# Allegro board TIDA-01606_Gate DriverE4_Sch_Rev13.brd
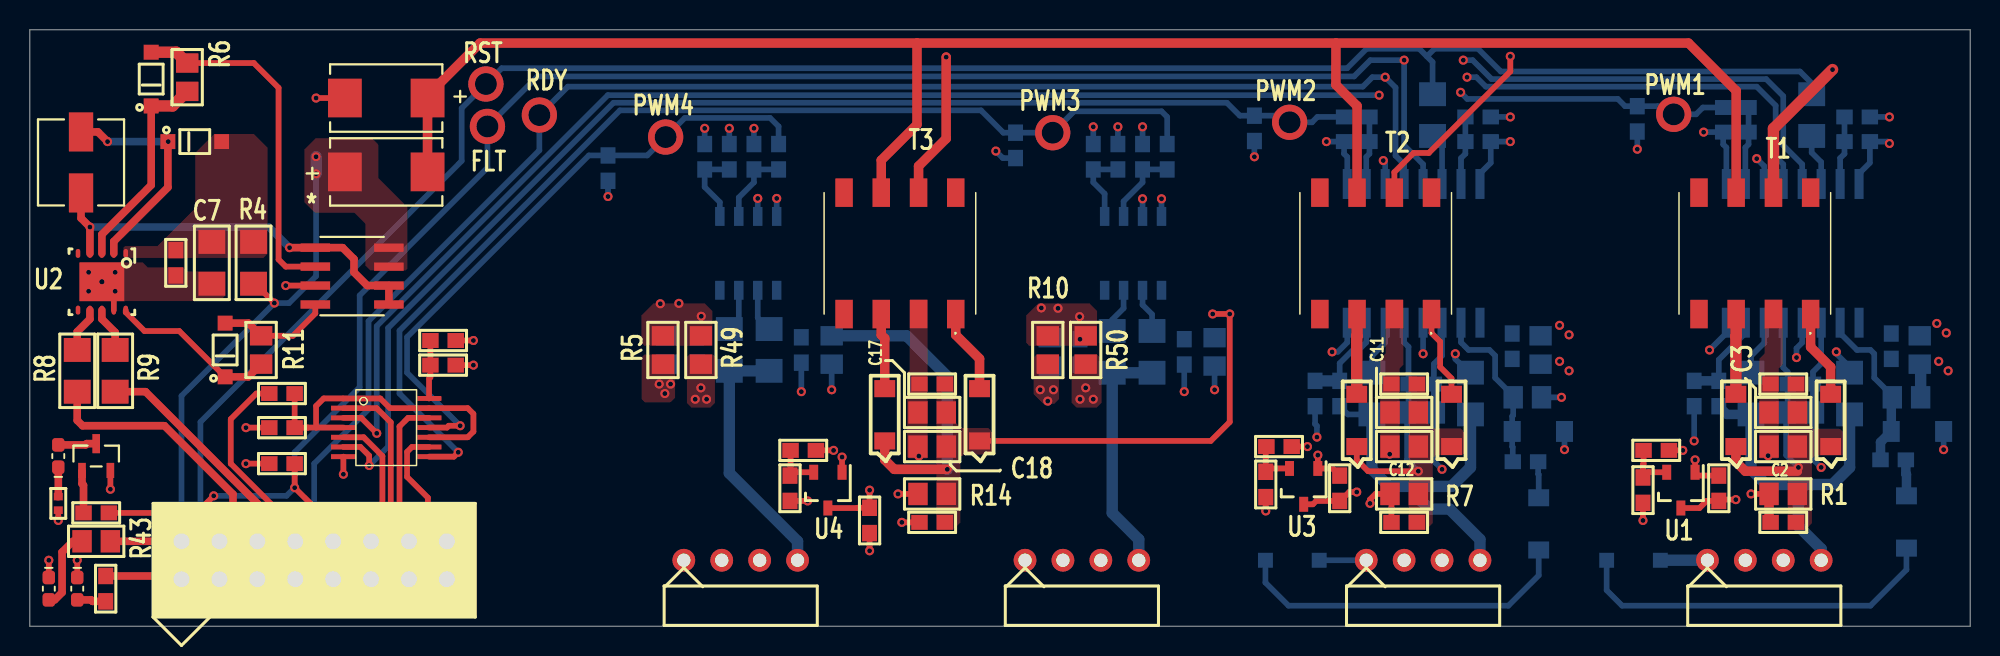
[diagram p0: board, top side]
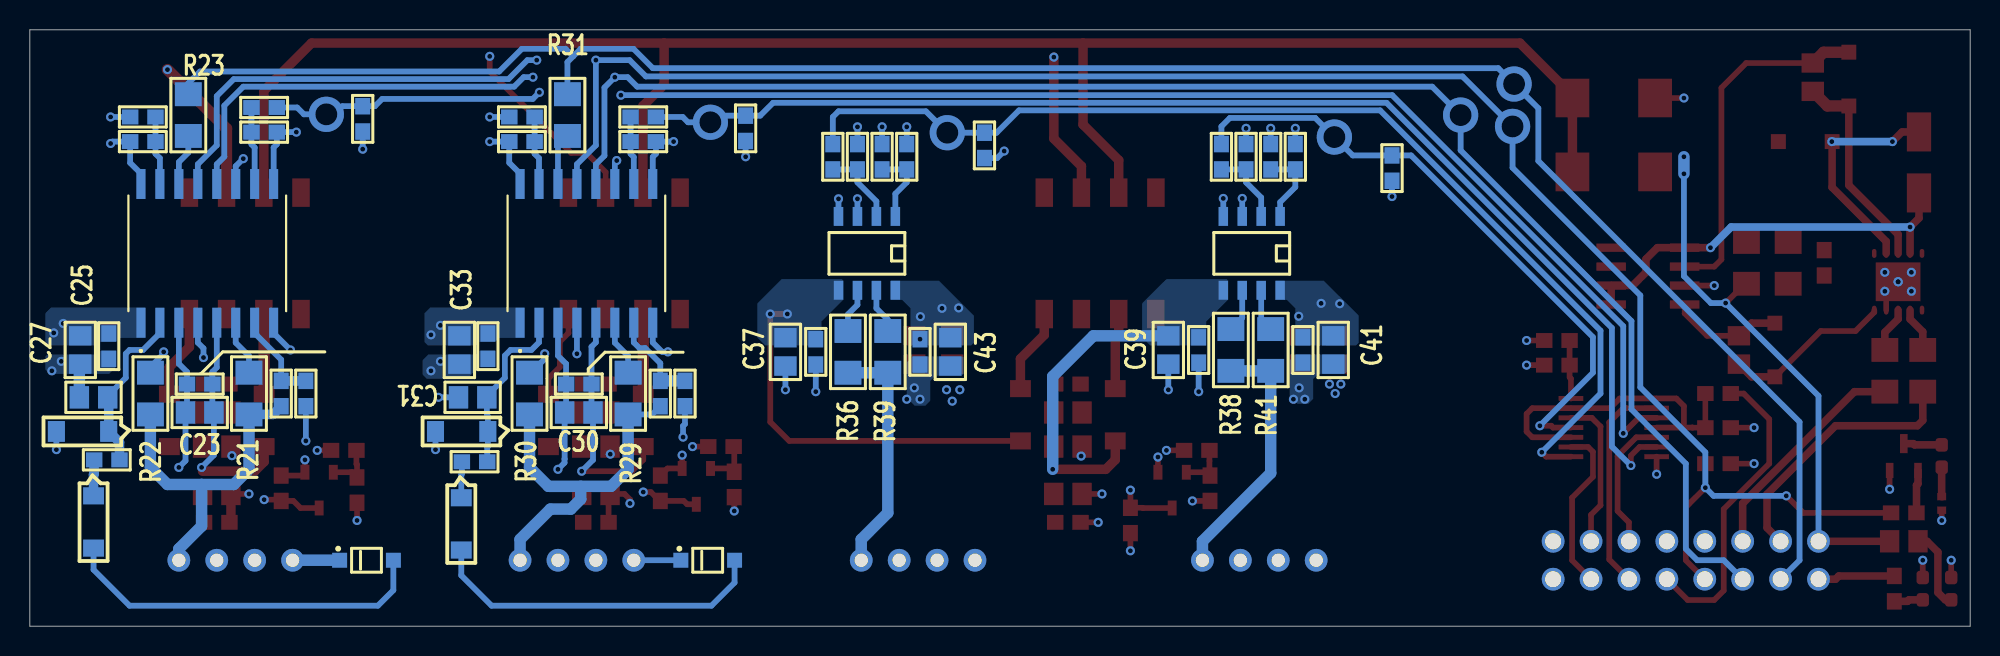
[diagram p1: board, bottom side, seen from below]

Outline 130 x 39.98 mm; copper layers: TOP, PWR_LAYER, GND_LAYER, BOTTOM. Coordinates in mm from the lower left corner of the outline.
Outline path: 0,39.98 0,0 130,0 130,39.98 0,39.98

## Design rules (mm)
constraint set DEFAULT: min track width 0.127

## Placement (name value [footprint] x y rotation side)
C1  0.1u 0603 25V  [RES0603]  117.47 6.96 180 top
C2  4.7u 0805 50V  [SNPD0805_MODIFIED]  117.47 12.04 180 top
C3  4.7u 0805 50V  [SNPD0805_MODIFIED]  117.47 14.33 180 top
C4  0.1u 0603 25V  [RES0603]  117.47 16.23 180 top
C5  0.1u 0603 25V  [RES0603]  113.16 9.25 270 top
C6  3.3u 50V 105C  [CAP2917]  23.88 30.45 0 top
C7  10u 1206 50V  [SNPD1206_MODIFIED]  12.19 24.36 270 top
C8  0.33u 0603 50V  [RES0603]  9.78 24.36 270 top
C9  0.1u 63V 105C  [CAP_J-V_5X6P1]  3.43 31.09 270 top
C10  0.1u 0603 25V  [RES0603]  92.08 6.96 180 top
C11  4.7u 0805 50V  [SNPD0805_MODIFIED]  92.08 14.33 180 top
C12  4.7u 0805 50V  [SNPD0805_MODIFIED]  92.08 12.04 180 top
C13  0.1u 0603 25V  [RES0603]  92.08 16.23 180 top
C14  3.3u 50V 105C  [CAP2917]  23.88 35.41 180 top
C15  0.1u 0603 25V  [RES0603]  87.76 9.25 270 top
C16  0.1u 0603 25V  [RES0603]  60.45 6.96 180 top
C17  4.7u 0805 50V  [SNPD0805_MODIFIED]  60.45 14.33 180 top
C18  4.7u 0805 50V  [SNPD0805_MODIFIED]  60.45 12.04 180 top
C19  0.1u 0603 25V  [RES0603]  60.45 16.23 180 top
C20  0.1u 0603 25V  [RES0603]  56.26 7.09 90 top
C21  0.1u 0603 50V  [RES0603]  122.43 32.49 0 bottom
C22  0.1u 0603 50V  [RES0603]  118.62 16.23 0 bottom
C23  10u 0805 35V  [SNPD0805_MODIFIED]  118.62 14.33 0 bottom
C24  0.1u 0603 50V  [RES0603]  27.69 17.5 0 top
C25  100pF 0805 50V  [SNPD0805_MODIFIED]  125.73 15.34 0 bottom
C26  0.1u 0603 50V  [RES0603]  124.71 18.77 270 bottom
C27  10u 0805 35V  [SNPD0805_MODIFIED]  126.62 18.52 270 bottom
C28  0.1u 0603 50V  [RES0603]  97.03 32.49 0 bottom
C29  0.1u 0603 50V  [RES0603]  93.22 16.23 0 bottom
C30  10u 0805 35V  [SNPD0805_MODIFIED]  93.22 14.33 0 bottom
C31  100pF 0805 50V  [SNPD0805_MODIFIED]  100.33 15.34 0 bottom
C32  0.1u 0603 50V  [RES0603]  99.31 18.77 270 bottom
C33  10u 0805 35V  [SNPD0805_MODIFIED]  101.22 18.52 270 bottom
C34  0.1u 0603 50V  [RES0603]  72.9 31.47 90 bottom
C35  0.1u 0603 50V  [RES0603]  46.86 31.47 90 bottom
C36  0.1u 0603 50V  [RES0603]  77.34 18.39 270 bottom
C37  10u 0805 35V  [SNPD0805_MODIFIED]  79.38 18.39 270 bottom
C38  0.1u 0603 50V  [RES0603]  51.69 18.52 270 bottom
C39  10u 0805 35V  [SNPD0805_MODIFIED]  53.72 18.52 270 bottom
C40  0.1u 0603 50V  [RES0603]  44.7 18.52 270 bottom
C41  10u 0805 35V  [SNPD0805_MODIFIED]  42.67 18.52 270 bottom
C42  0.1u 0603 50V  [RES0603]  70.36 18.39 270 bottom
C43  10u 0805 35V  [SNPD0805_MODIFIED]  68.33 18.39 270 bottom
C44  100pF 0603 50V  [RES0603]  114.3 33.12 180 bottom
C45  100pF 0603 50V  [RES0603]  88.9 32.49 180 bottom
C46  100pF 0603 50V  [RES0603]  74.55 31.47 90 bottom
C47  100pF 0603 50V  [RES0603]  48.51 31.47 90 bottom
D1  MBR0580-TP  [SOD123]  120.65 12.04 90 top
D2  B160-13-F  [DO214]  11.05 32.49 0 top
D3  LSM115JE3/TR13  [DO214]  8.13 36.68 90 top
D4  MBR0580-TP  [SOD123]  95.25 12.04 90 top
D5  LSM115JE3/TR13  [DO214]  13.08 18.52 90 top
D6  MBR0580-TP  [SOD123]  88.9 12.04 90 top
D7  RS1MB-13-F  [DO214]  107.44 4.42 180 bottom
D8  MMSZ4699T1G 12V  [SOD123]  124.71 13.06 0 bottom
D9  RS1MB-13-F  [DO214]  84.58 4.42 180 bottom
D10  MMSZ4699T1G 12V  [SOD123]  99.31 13.06 0 bottom
D11  LED RED 0603  [LED0603]  1.91 11.4 90 top
D12  LED GREEN 0603  [LED0603]  3.17 2.51 270 top
D13  LED GREEN 0603  [LED0603]  1.27 2.51 270 top
D14  MBR0580-TP  [SOD123]  114.3 12.04 90 top
D15  MBR0580-TP  [SOD123]  63.63 12.42 90 top
D16  MBR0580-TP  [SOD123]  57.28 12.42 90 top
D17  MMSZ4683T1G 3V  [SOD123]  125.73 8.74 270 bottom
D18  MMSZ4683T1G 3V  [SOD123]  101.09 8.61 270 bottom
J1  HEADER 8X2  [CONN8X2]  10.16 3.15 0 top
J2  HEADER 4  [SIP4_RUP]  112.39 4.42 90 top
J3  HEADER 4  [SIP4_RUP]  89.53 4.42 90 top
J5  HEADER 4  [SIP4_RUP]  66.67 4.42 90 top
J6  HEADER 4  [SIP4_RUP]  43.81 4.42 90 top
Q1  NAMT20  [D8]  21.59 23.47 0 top
Q2  BC856A-7-F  [SOT23]  4.45 11.4 0 top
R1  4.7K 0805 5%  [SNPD0805_MODIFIED]  117.47 8.86 0 top
R2  4.99K 0603 1%  [RES0603]  108.97 11.79 0 top
R3  4.99K 0603 1%  [RES0603]  108.08 9.12 90 top
R4  0E 1206 5%  [SNPD1206_MODIFIED]  14.99 24.36 270 top
R5  0E 0805 5%  [SNPD0805_MODIFIED]  42.42 18.52 270 top
R6  17.8E 0805 1%  [SNPD0805_MODIFIED]  10.54 36.8 90 top
R7  4.7K 0805 5%  [SNPD0805_MODIFIED]  92.08 8.86 0 top
R8  0E 1206 5%  [SNPD1206_MODIFIED]  3.17 17.12 90 top
R9  0E 1206 5%  [SNPD1206_MODIFIED]  5.71 17.12 90 top
R10  0E 0805 5%  [SNPD0805_MODIFIED]  68.2 18.52 270 top
R11  17.8E 0805 1%  [SNPD0805_MODIFIED]  15.49 18.52 90 top
R12  4.99K 0603 1%  [RES0603]  83.69 12.04 0 top
R13  4.99K 0603 1%  [RES0603]  82.8 9.5 90 top
R14  4.7K 0805 5%  [SNPD0805_MODIFIED]  60.45 8.86 0 top
R15  4.99K 0603 1%  [RES0603]  51.82 11.79 0 top
R16  4.99K 0603 1%  [RES0603]  50.93 9.25 90 top
R17  10E 0603 1%  [RES0603]  122.43 34.14 180 bottom
R18  10E 0603 1%  [RES0603]  27.69 19.15 180 top
R19  100E 0603 1%  [RES0603]  114.3 34.77 0 bottom
R20  1K 0603 5%  [RES0603]  124.84 11.15 0 bottom
R21  2E 1206 1%  [SNPD1206_MODIFIED]  115.32 15.6 270 bottom
R22  2E 1206 1%  [SNPD1206_MODIFIED]  121.92 15.6 270 bottom
R23  0E 1206 5%  [SNPD1206_MODIFIED]  119.38 34.26 270 bottom
R24  0E 0603 5%  [RES0603]  16.89 15.6 0 top
R25  10K 0603 1%  [RES0603]  16.89 13.31 0 top
R26  10E 0603 1%  [RES0603]  97.03 34.14 180 bottom
R27  100E 0603 1%  [RES0603]  88.9 34.14 0 bottom
R28  1K 0603 5%  [RES0603]  100.2 11.02 0 bottom
R29  2E 1206 1%  [SNPD1206_MODIFIED]  89.92 15.6 270 bottom
R30  2E 1206 1%  [SNPD1206_MODIFIED]  96.52 15.6 270 bottom
R31  0E 1206 5%  [SNPD1206_MODIFIED]  93.98 34.26 270 bottom
R32  10K 0603 1%  [RES0603]  16.89 10.9 180 top
R33  10E 0603 1%  [RES0603]  71.25 31.47 270 bottom
R34  10E 0603 1%  [RES0603]  45.21 31.47 270 bottom
R35  100E 0603 1%  [RES0603]  76.2 31.47 270 bottom
R36  3.3E 1206 5%  [SNPD1206_MODIFIED]  75.18 18.39 270 bottom
R37  100E 0603 1%  [RES0603]  50.16 31.47 270 bottom
R38  3.3E 1206 5%  [SNPD1206_MODIFIED]  49.53 18.52 270 bottom
R39  3.3E 1206 5%  [SNPD1206_MODIFIED]  72.52 18.39 270 bottom
R40  20K 0603 1%  [RES0603]  4.45 7.59 180 top
R41  3.3E 1206 5%  [SNPD1206_MODIFIED]  46.86 18.52 270 bottom
R42  620E 0603 1%  [RES0603]  5.08 2.51 90 top
R43  1.3K 0805 5%  [SNPD0805_MODIFIED]  4.45 5.69 0 top
R44  120E 0402 5%  [RES0402]  1.91 8.23 90 top
R45  0E 0603  5%  [RES0603]  111.51 15.6 270 bottom
R46  NC  [RES0603]  113.16 15.6 270 bottom
R47  0E 0603  5%  [RES0603]  86.11 15.6 270 bottom
R48  NC  [RES0603]  87.76 15.6 270 bottom
R49  NC  [SNPD0805_MODIFIED]  44.96 18.52 90 top
R50  NC  [SNPD0805_MODIFIED]  70.74 18.52 90 top
R51  10K 0603 1%  [RES0603]  38.73 30.71 90 bottom
R52  10K 0603 1%  [RES0603]  66.04 32.23 90 bottom
R53  10K 0603 1%  [RES0603]  82.04 33.38 90 bottom
R54  10K 0603 1%  [RES0603]  107.7 34.01 90 bottom
T1  -  [750343804]  115.57 24.99 90 top
T2  -  [750343804]  90.17 24.99 90 top
T3  -  [750343804]  58.29 24.99 90 top
U1  DBZ0003A  [DBZ0003A_N]  110.62 9.12 270 top
U2  UCC27211DPRR  [DPR0010A]  4.83 23.09 270 top
U3  DBZ0003A  [DBZ0003A_N]  85.34 9.37 270 top
U4  DBZ0003A  [DBZ0003A_N]  53.47 9.12 270 top
U5  ISO5852SDWR  [DW0016A_N]  118.11 24.99 90 bottom
U6  SN74LVC126APWR  [TSSOP14]  23.88 13.31 0 top
U7  ISO5852SDWR  [DW0016A_N]  92.71 24.99 90 bottom
U8  UCC5320SCD  [SOIC8_REV1]  73.91 24.99 270 bottom
U9  UCC5320SCD  [SOIC8_REV1]  48.13 24.99 270 bottom

## Library data of the parts
C1-C5 C7 C8 C10-C13 C15-C47 = CAP NP: room: control_smps
C6 C14 = CAP: room: 24Vcc3_smps
C9 = CAP: User Part Number: PN; Tolerance: TOL; room: 24Vcc3_smps
D1-D6 D8 D10 D14-D18 = DIODE ZENER: room: control_smps
D7 D9 = DIODE: room: pwmIC
D11-D13 = LED: room: lcd_led_pic
J1 = HEADER 8X2_0
J2 = HEADER 4_0
J3 = HEADER 4_1
J5 = HEADER 4_2
J6 = HEADER 4_3
Q1 = NAMT20_1: User Part Number: PN
Q2 = PNP BEC
R1-R54 = RESISTOR: room: control_smps
T1-T3 = TRANSFORMER STEPUP_0
U1 = DIODE ZENER_4: User Part Number: PN; Tolerance: TOL; room: control_smps
U2 = UCC21520ADWR_1: User Part Number: PN; Tolerance: TOL; room: DrvIC_Aph_driver
U3 = DIODE ZENER_5: User Part Number: PN; Tolerance: TOL; room: control_smps
U4 = DIODE ZENER_6: User Part Number: PN; Tolerance: TOL; room: control_smps
U5 = UCC21520ADWR_4: User Part Number: PN; Tolerance: TOL; room: DrvIC_Aph_driver
U6 = DM3AT-SF-PEJM5_2
U7 = UCC21520ADWR_5: User Part Number: PN; Tolerance: TOL; room: DrvIC_Aph_driver
U8 U9 = DM3AT-SF-PEJM5_1

## Footprints (pads in the part's own frame, mm; a bottom-side part is the same pattern mirrored in y, then rotated)
750343804
  rect 1.91x1.17 smd: 1(-4.07,-3.74) 2(-4.07,-1.25) 3(-4.07,1.25) 4(-4.07,3.74) 5(4.07,3.74) 6(4.07,1.25) 7(4.07,-1.25) 8(4.07,-3.74)
CAP2917
  rect 2.261x2.591 smd: 1(-2.769,0) 2(2.769,0)
CAP_J-V_5X6P1
  rect 2.616x1.626 smd: 1(-2.045,0) 2(2.045,0)
CONN8X2
  round 1.524 hole 1.067: 1(0,0) 2(0,2.54) 3(2.54,0) 4(2.54,2.54) 5(5.08,0) 6(5.08,2.54) 7(7.62,0) 8(7.62,2.54) 9(10.16,0) 10(10.16,2.54) 11(12.7,0) 12(12.7,2.54) 13(15.24,0) 14(15.24,2.54) 15(17.78,0) 16(17.78,2.54)
D8
  rect 1.981x0.559 smd: 1(-2.464,1.905) 2(-2.464,0.635) 3(-2.464,-0.635) 4(-2.464,-1.905) 5(2.464,-1.905) 6(2.464,-0.635) 7(2.464,0.635) 8(2.464,1.905)
DBZ0003A_N
  rect 1x0.6 smd: 1(-1.2,0.95) 2(-1.2,-0.95) 3(1.2,0)
DO214
  rect 1x1 smd: 1(-1.8,0) 2(1.8,0)
DPR0010A
  oval 0.6x0.3 smd: 1(-1.9,1.6) 2(-1.9,0.8) 3(-1.9,0) 4(-1.9,-0.8) 5(-1.9,-1.6) 6(1.9,-1.6) 7(1.9,-0.8) 8(1.9,0) 9(1.9,0.8) 10(1.9,1.6)
  rect 2.6x3 smd: 11(0,0)
DW0016A_N
  rect 2.007x0.61 smd: 1(-4.65,4.445) 2(-4.65,3.175) 3(-4.65,1.905) 4(-4.65,0.635) 5(-4.65,-0.635) 6(-4.65,-1.905) 7(-4.65,-3.175) 8(-4.65,-4.445) 9(4.65,-4.445) 10(4.65,-3.175) 11(4.65,-1.905) 12(4.65,-0.635) 13(4.65,0.635) 14(4.65,1.905) 15(4.65,3.175) 16(4.65,4.445)
LED0603
  custom 0.91x0.83 smd: 1(-0.75,0) 2(0.75,0)
RES0402
  rect 0.5x0.6 smd: 1(-0.455,0) 2(0.455,0)
RES0603
  rect 1.1x1 smd: 1(-0.85,0) 2(0.85,0)
SIP4_RUP
  round 1.524 hole 0.889: 1(0,0) 2(0,-2.54) 3(0,-5.08) 4(0,-7.62)
SNPD0805_MODIFIED
  rect 1.3x1.5 smd: 1(-0.95,0) 2(0.95,0)
SNPD1206_MODIFIED
  rect 1.6x1.8 smd: 1(-1.4,0) 2(1.4,0)
SOD123
  rect 1.143x1.397 smd: 1(0,0) 2(3.505,0)
SOIC8_REV1
  rect 1.27x0.635 smd: 1(-2.477,1.905) 2(-2.477,0.635) 3(-2.477,-0.635) 4(-2.477,-1.905) 5(2.477,-1.905) 6(2.477,-0.635) 7(2.477,0.635) 8(2.477,1.905)
SOT23
  rect 0.508x1.016 smd: 1(-0.95,-0.965) 2(0.95,-0.965)
  rect 0.508x1.283 smd: 3(0,0.832)
TSSOP14
  rect 1.651x0.33 smd: 1(-2.87,1.956) 2(-2.87,1.306) 3(-2.87,0.655) 4(-2.87,0.005) 5(-2.87,-0.645) 6(-2.87,-1.295) 7(-2.87,-1.946) 8(2.87,-1.946) 9(2.87,-1.295) 10(2.87,-0.645) 11(2.87,0.005) 12(2.87,0.655) 13(2.87,1.306) 14(2.87,1.956)

## Nets
+3V3: J1.1 Q2.2(EMITTER) R17.1 R18.1 R26.1 R32.2 R33.1 R34.1 R42.2
+12V_MID: C16.1 C17.1 C18.1 C19.1 C36.1 C37.1 C38.1 C39.1 D15.1(CATHODE) D16.1(CATHODE) R14.2 U8.5 U9.5
+15V: C6.1 J1.2 Q1.7 Q1.8 R4.2 R43.2
+20V_BOT: C10.1 C11.1 C12.1 C13.1 C29.1 C30.1 D4.1(CATHODE) D6.1(CATHODE) R7.2 U7.5
+20V_TOP: C1.1 C2.1 C3.1 C4.1 C22.1 C23.1 D1.1(CATHODE) D14.1(CATHODE) R1.2 U5.5
-5V_BOT: C11.2 C12.2 C13.2 C15.2 C32.1 C33.1 R13.1 T2.2 U3.3 U7.1 U7.8(VEE2A)
-5V_MID: C17.2 C18.2 C19.2 C20.2 R5.2 R10.2 R16.1 T3.2 U4.3
-5V_TOP: C2.2 C3.2 C4.2 C5.2 C26.1 C27.1 R3.1 T1.2 U1.3 U5.1 U5.8(VEE2A)
0: C1.2 C5.1 C7.2 C8.2 C10.2 C14.2 C15.1 C16.2 C20.1 C21.2 C22.2 C23.2 C24.2 C25.2 C26.2 C27.2 C28.2 C29.2 C30.2 C31.2 C32.2 C33.2 C34.2 C35.2 C36.2 C37.2 C38.2 C39.2 C40.2 C41.2 C42.2 C43.2 C44.2 C45.2 C46.2 C47.2 D8.2 D10.2 D12.1(CATHODE) D13.1(CATHODE) J1.15 J1.16 J2.3 J3.3 J5.3 J6.3 Q1.3(S2) R1.1 R2.2 R7.1 R12.2 R14.1 R15.2 R25.1 R44.1 R45.2 R47.2 R49.1 R50.1 R51.1 R52.1 R53.1 R54.1 U1.1 U2.9(VSS) U2.11 U3.1 U4.1 U5.3 U5.9 U5.11 U5.16 U6.7 U7.3 U7.9 U7.11 U7.16 U8.3 U8.4 U9.3 U9.4
DESAT_BOT: D9.1(K) J3.1
DESAT_TOP: D7.1(K) J2.1
FLT: J1.7 R32.1 R40.1 U5.13 U7.13
GATE_BOT: J3.4 R29.2 R30.2 R48.2
GATE_MID_BOT: J6.4 R38.2 R41.2
GATE_MID_TOP: J5.4 R36.2 R39.2
GATE_TOP: J2.4 R21.2 R22.2 R46.2
HI_PWM: J1.4 R8.1
HS: C9.2 Q1.1 Q1.5 Q1.6 T1.7 T2.7 T3.7 U2.4
HSG: D3.1(CATHODE) R6.1 U2.3
LI_PWM: J1.6 R9.1
LS1: C6.2 C14.1 T1.6 T2.6 T3.6
LSG: D5.1(CATHODE) R11.1 U2.10
PWM1: J1.11 U6.2
PWM1_B: R19.1 R54.2 U6.3
PWM2: J1.12 U6.5
PWM2_B: R27.1 R53.2 U6.6
PWM3: J1.13 U6.9
PWM3_B: R35.1 R52.2 U6.8
PWM4: J1.14 U6.12
PWM4_B: R37.1 R51.2 U6.11
PWM_EN: J1.9 R24.1
RDY: J1.5 U5.12 U7.12
RST: J1.3 R23.1 R31.1
N14260728: R8.2 U2.7
N14260730: R9.2 U2.8
N14260848: C7.1 C8.1 D2.2 R4.1 U2.1
N14261056: C9.1 D2.1(CATHODE) U2.2
N14261289: D3.2 Q1.2 R6.2
N14261406: D5.2 Q1.4 R11.2
N14262465: D1.2 T1.1
N14262469: D14.2 T1.3
N14263632: R2.1 R3.2 U1.2(REF)
N14266555: D4.2 T2.1
N14266595: D6.2 T2.3
N14266769: R12.1 R13.2 U3.2(REF)
N14267414: D15.2 T3.1
N14267454: D16.2 T3.3
N14267628: R15.1 R16.2 U4.2(REF)
N14268473: C21.1 R17.2 U5.15
N14268603: C44.1 R19.2 U5.10
N14268836: R23.2 U5.14
N14269969: C25.1 D8.1(CATHODE) R20.1 U5.2
N14270095: R45.1 R46.1 U5.7
N14270209: R22.1 U5.4
N14270213: R21.1 U5.6
N14271306: C28.1 R26.2 U7.15
N14271358: C45.1 R27.2 U7.10
N14271436: R31.2 U7.14
N14271630: C31.1 D10.1(CATHODE) R28.1 U7.2
N14271680: R47.1 R48.1 U7.7
N14271756: R30.1 U7.4
N14271760: R29.1 U7.6
N14273731: C34.1 R33.2 U8.1
N14274223: C46.1 R35.2 U8.2
N14275263: R36.1 U8.6
N14275267: R39.1 U8.7
N14275449: C42.1 C43.1 R10.1 R50.2 U8.8(VEE2)
N14277948: C35.1 R34.2 U9.1
N14278020: C47.1 R37.2 U9.2
N14278158: R38.1 U9.6
N14278178: R41.1 U9.7
N14278260: C40.1 C41.1 R5.1 R49.2 U9.8(VEE2)
N14279464: C24.1 R18.2 U6.14(VCC)
N14279480: R24.2 R25.2 U6.1 U6.4 U6.10 U6.13
N14283740: D12.2 R42.1
N14284020: D13.2 R43.1
N14289569: Q2.1 R40.2
N14289599: D11.2 Q2.3
N14303671: D17.1(CATHODE) R20.2
N142699350: D7.2 D17.2
N142715901: D18.1(CATHODE) R28.2
N142716060: D9.2 D18.2
N142895931: D11.1(CATHODE) R44.2

Pads without a net: J1 8 10; J2 2; J3 2; J5 1 2; J6 1 2; T1 4 5 8; T2 4 5 8; T3 4 5 8; U2 5 6

## Via types
v1: diameter 2.362, hole 1.473, TOP to BOTTOM, 7 vias
v2: diameter 0.61, hole 0.33, TOP to BOTTOM, 130 vias

## Routing (per net, layer and track width the routed paths; a pad name or vN(x,y) marks a point on that pad's centre or on a via; arc(x,y) is an arc through that point)
+3V3: length 37.7
  TOP w0.381: Q2.2 v2(5.39,9.18) ; R32.2 v2(14.48,10.9) ; R18.1 v2(29.72,19.15)
  TOP w0.508: J1.1 9.02,3.15 8.8,3.36 R42.2
  PWR_LAYER w0.381: v2(99.19,34.14) 101.98,31.34 101.98,27.43 ; v2(124.59,34.14) 117.83,27.38 117.47,27.38 ; v2(71.25,33.48) 71.25,30.63 ; v2(45.21,33.38) 45.21,30.25
  BOTTOM w0.381: R26.1 v2(99.19,34.14) ; R34.1 v2(45.21,33.38) ; R17.1 v2(124.59,34.14) ; R33.1 v2(71.25,33.48)
+12V_MID: length 46.4
  TOP w0.381: D15.1 79.12,12.42 80.39,13.69 v2(80.39,20.93) v2(79.25,20.93)
  TOP w0.635: D16.1 57.28,11.15 57.91,10.52 61.4,10.52
  BOTTOM w0.762: C39.1 58.74,19.47 61.47,16.74 v2(61.47,10.52)
+15V: length 36.8
  TOP w0.381: v2(16.38,21.66) 15.09,22.96 R4.2
  TOP w0.508: R43.2 J1.2
  BOTTOM w0.381: J1.2 10.16,15.44 v2(16.38,21.66) 17.37,21.66 19.18,23.47 v2(19.18,30.33)
  BOTTOM w0.762: v2(19.18,31.47) v2(19.18,30.33)
+20V_BOT: length 15.8
  TOP w0.381: v2(93.02,10.39) 89.66,10.39 88.9,11.15 D6.1
  BOTTOM w0.381: v2(93.02,10.39) 92.27,11.15 C30.1 92.37,14.43 C29.1 92.37,18.73 92.08,19.02 92.08,20.34
+20V_TOP: length 15.6
  TOP w0.635: D14.1 114.3,11.02 114.94,10.39 118.42,10.39
  BOTTOM w0.381: U5.5 117.47,17.34 117.77,17.05 C22.1 117.77,14.43 C23.1 117.67,11.47 v2(118.49,10.64)
-5V_BOT: length 7.4
  TOP w0.381: U3.3 85.96,8.17 86.18,8.4 C15.2 87.8,8.4 88.39,8.99 v2(88.9,8.99) ; R13.1 v2(82.8,7.72)
  BOTTOM w0.381: U7.8 88.27,19.02 87.63,18.39 v2(87.25,18.39)
  vias: v2(91.11,11.53) v2(102.49,20.17) v2(103.12,19.53)
-5V_MID: length 5.8
  TOP w0.381: C18.2 59.56,11.98 v2(59.56,11.4) ; R16.1 v2(52.11,8.4) ; v2(56.26,9.12) C20.2 55.44,7.94 55.43,7.92 U4.3
  vias: v2(42.16,16.23) v2(42.55,15.6) v2(42.93,16.23) v2(67.69,15.85) v2(68.2,15.09) v2(68.58,15.85)
-5V_TOP: length 7.4
  TOP w0.381: U1.3 111.86,7.92 112.34,8.4 C5.2 113.24,8.48 v2(114.3,8.48) ; R3.1 v2(108.08,7.09)
  BOTTOM w0.381: U5.8 113.67,19.65 v2(112.54,18.52)
  vias: v2(116.46,11.43) v2(127.76,20.29) v2(128.4,19.66)
0: length 106.3
  TOP w0.381: R15.2 v2(53.85,11.79) ; D13.1 v2(1.27,4.42) ; C20.1 v2(56.26,5.05) ; R14.1 v2(58.17,8.86) ; R12.2 v2(85.6,12.04) ; C24.2 v2(29.72,17.5) ; v2(3.17,4.42) D12.1 ; U2.9 5.63,22.29 v2(4.83,23.09) ; Q1.3 v2(17.14,22.83) ; v2(89.79,8.23) 89.79,8.5 90.16,8.86 R7.1 91.23,8.76 C10.2 ; C16.2 v2(58.42,6.96) ; R25.1 v2(14.48,13.31) ; C14.2 v2(19.18,35.41) ; v2(111.57,11.15) U1.1 111.79,10.1 C5.1 ; R44.1 v2(1.91,7.09) ; U4.1 v2(54.42,11.34) ; U6.7 v2(21.01,10.19) ; v2(110.74,11.79) R2.2 ; R1.1 v2(115.32,8.86) ; v2(86.29,11.47) U3.1 87.28,10.57 C15.1
  TOP w0.635: C1.2 116.53,7.06 R1.1
  BOTTOM w0.381: v2(86.87,32.49) C45.2 88.05,31.67 88.27,31.45 U7.9 ; U8.3 v2(74.55,28.65) ; C38.2 v2(51.69,15.72) ; U7.3 94.61,18.14 94.07,17.59 C29.2 94.07,14.43 C30.2 94.17,11.22 94.17,11.21 94.17,10.96 v2(94.61,10.52) ; v2(99.19,32.49) C28.2 97.88,31.06 97.16,30.34 U7.16 ; U5.9 113.67,32.09 113.45,32.3 C44.2 v2(112.14,33.12) ; U5.16 122.56,30.34 123.28,31.06 C21.2 124.46,32.49 v2(124.59,32.36) ; R52.1 65.19,31.38 v2(64.72,31.85) ; R54.1 v2(107.7,31.98) ; R45.2 v2(111.51,12.42) ; U5.3 120.02,17.6 119.47,17.05 C22.2 119.47,14.43 C23.2 119.57,11.09 v2(120.02,10.64) ; C39.2 v2(53.72,15.85) ; C31.2 v2(102.62,15.34) ; C36.2 v2(77.34,15.72) ; v2(115.7,31.34) 116.2,30.84 U5.11 ; C47.2 v2(48.51,33.38) ; U9.3 v2(48.77,28.68) ; v2(86.23,12.67) 86.23,13.42 86.11,13.55 R47.2 ; U9.4 v2(50.04,28.68) ; U7.11 90.81,31.09 v2(90.68,31.22) ; U8.4 v2(75.82,28.65) ; D8.2 v2(128.22,11.84) ; C34.2 v2(72.9,33.48) ; C46.2 v2(74.55,33.48) ; D10.2 v2(102.82,11.84) ; C35.2 v2(46.86,33.38) ; R51.1 v2(38.73,28.8) ; C37.2 v2(79.38,15.85) ; R53.1 v2(82.04,31.47)
  BOTTOM w0.762: C25.2 126.68,17.51 C27.2
  vias: v2(3.94,23.72) v2(3.94,22.45) v2(5.71,23.72) v2(5.71,22.45) v2(44.58,15.21) v2(44.96,15.98) v2(45.34,15.21) v2(70.36,15.21) v2(70.74,15.98) v2(71.25,15.21) v2(102.49,17.75) v2(103.12,17.12) v2(127.89,17.75) v2(128.52,17.12)
DESAT_BOT: length 3.2
  BOTTOM w0.381: D9.1 J3.1
DESAT_TOP: length 3.2
  BOTTOM w0.762: D7.1 J2.1
FLT: length 156.4
  TOP w0.381: R40.1 11.18,7.59 v2(12.32,8.74) ; J1.7 19.05,4.42 19.05,7.98 v2(17.74,9.28) R32.1
  PWR_LAYER w0.381: v2(92.08,37.95) v2(96.04,37.95)
  BOTTOM w0.381: v2(96.04,37.95) 96.66,37.95 97.93,36.68 116.33,36.68 117.47,35.53 117.47,32.23 118.75,30.96 U5.13 ; U7.13 93.34,30.96 92.08,32.23 v2(92.08,37.95) 89.81,37.95 88.72,36.86 34.01,36.86 v1(30.66,33.5) 30.66,30.73 22.1,22.17 22.1,16.02 17.74,11.66 v2(17.74,9.28) 17.19,8.74 v2(12.32,8.74)
GATE_BOT: length 24.7
  BOTTOM w0.381: R48.2 88.31,14.2 R29.2
  BOTTOM w0.762: 93.09,9.37 95.25,9.37 96.52,10.64 R30.2 ; 93.09,9.37 91.06,9.37 89.92,10.52 R29.2 ; 93.09,9.37 93.09,8.51 93.76,7.85 95.12,7.85 97.16,5.82 J3.4
GATE_MID_BOT: length 17.3
  BOTTOM w0.762: R38.2 R41.2 46.86,10.26 51.44,5.69 51.44,4.42
GATE_MID_TOP: length 16
  BOTTOM w0.762: R36.2 R39.2 72.52,7.59 74.3,5.82 J5.4
GATE_TOP: length 22.8
  BOTTOM w0.635: R21.2 113.71,14.2 R46.2
  BOTTOM w0.762: J2.4 120.02,5.18 118.49,6.71 118.49,9.5 ; R22.2 121.92,10.64 120.78,9.5 118.49,9.5 ; 118.49,9.5 116.33,9.5 115.32,10.52 R21.2
HI_PWM: length 17.9
  TOP w0.508: J1.4 13.61,6.6 13.61,8.84 9.02,13.44 3.53,13.44 3.17,13.8 R8.1
HS: length 193.9
  TOP w0.381: v2(99.19,38.2) 99.19,37.19 93.73,31.72 92.71,31.72 91.42,30.43 T2.7
  TOP w0.508: v2(17.4,25.37) Q1.1 20.95,25.37 21.72,24.61 21.72,23.72 22.61,22.83 Q1.6 Q1.5 ; C9.2 3.43,27.36 v2(4.03,26.76) U2.4
  TOP w0.635: v2(61.39,38.15) 61.39,32.69 59.54,30.84 T3.7
  TOP w0.762: T1.7 116.82,33.36 v2(120.78,37.31)
  PWR_LAYER w0.381: v2(120.78,37.31) 119.89,38.2 v2(99.19,38.2) 98.07,39.32 62.56,39.32 v2(61.39,38.15) 59.97,39.57 4.09,39.57 1.52,37.01 1.52,29.26 v2(4.03,26.76)
  BOTTOM w0.508: v2(17.4,25.37) 16.01,26.76 v2(4.03,26.76)
HSG: length 14.1
  TOP w0.508: U2.3 4.83,26.26 8.13,29.57 D3.1
  TOP w0.762: D3.1 9.56,34.88 R6.1
LI_PWM: length 15.2
  TOP w0.508: J1.6 15.24,8.23 7.75,15.72 R9.1
LS1: length 124
  TOP w0.635: 87.5,39.09 87.5,36.3 88.92,34.88 T2.6 ; 87.5,39.09 59.44,39.09 ; 87.5,39.09 111.12,39.09 114.32,35.9 T1.6 ; C6.2 C14.1 26.64,35.57 30.16,39.09 59.44,39.09 ; T3.6 57.04,31.24 59.44,33.63 59.44,39.09
LSG: length 11.4
  TOP w0.381: U2.10 6.43,21.04 7.68,19.79 10.01,19.79 D5.1
  TOP w0.508: D5.1 14.64,16.72 R11.1
PWM1: length 14.6
  TOP w0.381: J1.11 24.18,4.47 24.18,13.67 23.23,14.62 U6.2
PWM1_B: length 107.4
  TOP w0.381: U6.3 22.2,13.96 v2(23.24,12.93) 23.24,12.93
  PWR_LAYER w0.381: v2(95.86,35.79) 95.24,35.79 95.05,35.6 v2(90.4,35.6)
  BOTTOM w0.381: v2(95.86,35.79) 96.3,35.35 106.39,35.35 106.88,34.86 R54.2 109.06,34.86 109.6,34.32 v1(110.13,34.32) 111.63,34.32 112.09,34.77 R19.1 ; v2(23.24,12.93) 23.24,20.12 38.72,35.6 v2(90.4,35.6)
PWM2: length 9.2
  TOP w0.381: J1.12 22.86,6.96 23.62,7.72 23.62,11.4 22.36,12.66 U6.5
PWM2_B: length 83.4
  TOP w0.381: v2(22.73,10.77) 22.73,11.43 22.15,12.01 U6.6
  BOTTOM w0.381: R27.1 86.26,34.14 85.9,33.78 v1(84.4,33.78) 83.96,34.23 R53.2 81.07,34.23 80.2,35.09 39.1,35.09 24,19.99 24,12.04 v2(22.73,10.77)
PWM3: length 11.2
  TOP w0.381: U6.9 25.6,12.01 25.27,11.68 25.27,10.01 26.67,8.61 26.67,4.42 J1.13
PWM3_B: length 72.6
  TOP w0.381: U6.8 28.41,11.36 v2(28.7,11.66)
  BOTTOM w0.381: v2(28.7,11.66) 24.77,15.6 24.77,19.81 39.54,34.58 63.72,34.58 65.22,33.08 R52.2 v1(68.53,33.08) 69.97,34.52 75.82,34.52 76.2,34.14 R35.1
PWM4: length 10.2
  TOP w0.381: J1.14 25.4,7.47 24.77,8.1 24.77,13.39 25.34,13.96 U6.12
PWM4_B: length 41.9
  TOP w0.381: U6.11 27.95,13.31 28.07,13.44 v2(28.83,13.44)
  BOTTOM w0.381: R37.1 50.16,33.5 49.59,34.07 43.88,34.07 v1(42.6,32.79) 41.36,31.56 R51.2 37.45,31.56 25.27,19.38 25.27,16.99 v2(28.83,13.44)
PWM_EN: length 20.7
  TOP w0.381: J1.9 18.92,1.75 17.14,1.75 16.51,2.39 16.51,7.85 13.46,10.9 13.46,13.88 15.17,15.6 R24.1
RDY: length 137.8
  PWR_LAYER w0.381: v2(90.81,36.8) v2(96.29,36.8)
  BOTTOM w0.381: 92.08,29.64 92.08,30.96 91.5,31.54 91.5,36.11 v2(90.81,36.8) 89.94,36.8 89.31,36.17 36.04,36.17 v1(34.14,34.26) 34.14,31.9 22.69,20.46 22.69,14.54 19.05,10.9 19.05,5.18 18.29,4.42 16.51,4.42 J1.5 ; U5.12 117.47,30.96 116.97,31.47 116.97,34.9 115.7,36.17 97.55,36.17 96.91,36.8 v2(96.29,36.8)
RST: length 136.4
  BOTTOM w0.381: 93.6,38.2 93.98,37.82 R31.1 93.98,35.66 ; 93.6,38.2 94.11,38.71 97.03,38.71 98.55,37.19 118.6,37.19 119.38,36.4 R23.1 119.38,35.53 ; 93.6,38.2 93.09,38.71 89.56,38.71 88.26,37.41 31.62,37.41 v1(30.56,36.35) 28.93,34.72 28.93,31.19 11.43,13.69 11.43,4.42 J1.3
N14260728: length 3
  TOP w0.508: R8.2 3.17,19.74 4.03,20.59 U2.7
N14260730: length 3
  TOP w0.508: R9.2 5.71,19.7 4.83,20.59 U2.8
N14261056: length 15.1
  TOP w0.508: C9.1 4.56,33.13 v2(5.21,32.49) ; D2.1 9.25,29.42 5.63,25.79 U2.2
  BOTTOM w0.508: v2(5.21,32.49) v2(9.27,32.49)
N14261289: length 23.7
  TOP w0.381: Q1.2 17.14,24.1 16.66,24.59 16.66,36.09 15,37.75 R6.2
  TOP w0.762: D3.2 9.82,38.48 R6.2
N14261406: length 7.6
  TOP w0.381: Q1.4 19.13,20.97 17.63,19.47 R11.2
  TOP w0.508: R11.2 14.64,20.32 D5.2
N14262465: length 5.9
  TOP w0.635: D1.2 120.65,17.37 119.31,18.71 T1.1
N14262469: length 5.4
  TOP w0.762: T1.3 114.32,19.46 114.3,19.44 D14.2
N14263632: length 3.6
  TOP w0.381: R2.1 108.12,10.88 108.08,10.84 R3.2 108.43,10.32 U1.2
N14266555: length 5.9
  TOP w0.381: T2.1 93.91,19.65 94.49,19.07 94.49,17.37 95.25,16.61 D4.2
N14266595: length 5.4
  TOP w0.762: T2.3 88.92,19.46 88.9,19.44 D6.2
N14266769: length 3.4
  TOP w0.381: U3.2 83.03,10.57 R13.2 82.8,12 R12.1
N14267414: length 5.7
  TOP w0.635: T3.1 62.03,19.52 63.63,17.93 D15.2
N14267454: length 5.1
  TOP w0.635: T3.3 57.04,19.52 57.28,19.29 D16.2
N14267628: length 4.3
  TOP w0.127: 50.97,11.09 50.93,11.06 R16.2
  TOP w0.381: U4.2 51.15,10.32 50.97,10.13 ; 50.97,10.13 R16.2 ; 50.97,10.13 R15.1
N14268473: length 4.6
  BOTTOM w0.381: U5.15 121.28,31.38 121.58,31.67 C21.1 R17.2
N14268603: length 5.2
  BOTTOM w0.381: U5.10 114.94,32.09 115.15,32.3 C44.1 R19.2
N14268836: length 3.5
  BOTTOM w0.381: R23.2 119.38,31.75 120.02,31.11 U5.14
N14269969: length 11.5
  BOTTOM w0.381: C25.1 124.78,15.44 123.57,16.65 123.57,18.26 123.32,18.52 122.41,18.52 121.28,19.65 U5.2
  BOTTOM w0.635: C25.1 124.71,15.28 D8.1 123.99,12.33 R20.1
N14270095: length 6.3
  BOTTOM w0.381: U5.7 114.94,19.65 113.16,17.87 R46.1
  BOTTOM w0.635: R45.1 R46.1
N14270209: length 7.1
  PWR_LAYER w0.381: v2(118.36,18.01) 120.03,18.01 120.41,18.39 v2(121.03,18.39)
  BOTTOM w0.381: U5.4 118.75,19.01 118.36,18.63 v2(118.36,18.01) ; v2(121.03,18.39) 121.03,18.26 121.92,17.37 R22.1
N14270213: length 3.7
  BOTTOM w0.381: R21.1 115.32,18.11 116.2,19 U5.6
N14271306: length 4.6
  BOTTOM w0.381: U7.15 95.89,31.38 96.18,31.67 C28.1 R26.2
N14271358: length 4.6
  BOTTOM w0.381: U7.10 89.53,31.45 89.75,31.67 C45.1 R27.2
N14271436: length 4.6
  BOTTOM w0.381: 93.85,32.99 94.61,32.23 94.61,32.23 ; 94.61,32.23 U7.14 ; 94.61,32.23 R31.2
N14271630: length 11.6
  BOTTOM w0.381: R28.1 99.35,12 99.31,12.04 D10.1 99.31,14.07 99.38,14.14 C31.1 99.38,15.44 98.17,16.65 98.17,18.14 97.79,18.52 96.39,18.52 95.89,19.02 U7.2
N14271680: length 6.5
  BOTTOM w0.381: U7.7 89.53,19.02 89.16,18.64 88.77,18.64 87.76,17.63 R48.1
  BOTTOM w0.762: R48.1 R47.1
N14271756: length 6
  PWR_LAYER w0.381: v2(93.34,18.26) v2(95.5,18.26)
  BOTTOM w0.381: U7.4 v2(93.34,18.26) ; v2(95.5,18.26) 95.5,17.91 96.42,17 R30.1
N14271760: length 3.7
  BOTTOM w0.381: R29.1 89.92,18.11 90.81,19 U7.6
N14273731: length 5.1
  BOTTOM w0.381: U8.1 72.01,28.99 71.25,29.75 R33.2 C34.1
N14274223: length 5.3
  BOTTOM w0.381: R35.2 C46.1 74.55,29.75 73.28,28.48 U8.2
N14275263: length 3
  BOTTOM w0.381: R36.1 75.18,20.91 74.55,21.54 U8.6
N14275267: length 3
  BOTTOM w0.381: U8.7 73.28,21.31 72.52,20.55 R39.1
N14275449:
  vias: v2(67.77,21.34) v2(68.88,21.31) v2(70.33,20.75) v2(70.36,19.24)
N14277948: length 5.2
  BOTTOM w0.381: U9.1 46.23,28.42 45.21,29.44 R34.2 C35.1
N14278020: length 5.2
  BOTTOM w0.381: R37.2 C47.1 48.51,29.75 47.5,28.74 U9.2
N14278158: length 2.9
  BOTTOM w0.381: U9.6 48.77,20.68 R38.1
N14278178: length 2.9
  BOTTOM w0.381: R41.1 47.5,20.55 U9.7
N14278260: length 0.1
  TOP w0.381: 44.83,19.47 R49.2
  vias: v2(42.24,21.62) v2(43.48,21.64) v2(44.98,20.78)
N14279464: length 3.9
  TOP w0.381: R18.2 C24.1 26.84,16.68 26.75,16.59 U6.14
N14279480: length 22.5
  TOP w0.381: 19.18,13.31 18.61,13.31 18.61,13.31 R25.2 R24.2 ; 19.18,13.31 U6.4 ; 19.18,13.31 19.18,14.76 19.68,15.27 U6.1 23.48,15.27 24.13,14.62 U6.13 29.34,14.62 29.72,14.23 29.72,13.05 29.34,12.66 U6.10
N14283740: length 1.9
  TOP w0.508: R42.1 4.2,1.66 4.1,1.76 D12.2
N14284020: length 5.4
  TOP w0.508: D13.2 1.66,1.76 2.16,2.26 2.16,4.96 2.89,5.69 R43.1
N14289569: length 2.9
  TOP w0.508: R40.2 3.6,9.45 3.5,9.55 Q2.1
N14289599: length 2.6
  TOP w0.508: Q2.3 3.81,12.24 3.73,12.15 D11.2
N14303671: length 2.4
  BOTTOM w0.635: D17.1 125.73,10.17 125.69,10.21 R20.2
N142699350: length 25
  BOTTOM w0.381: D17.2 125.73,3.78 123.32,1.37 106.68,1.37 105.64,2.41 D7.2
N142715901: length 2.4
  BOTTOM w0.381: R28.2 101.05,10.21 101.09,10.17 D18.1
N142716060: length 23
  BOTTOM w0.381: D9.2 82.78,2.92 84.33,1.37 99.06,1.37 101.09,3.4 D18.2
N142895931: length 2
  TOP w0.508: R44.2 D11.1

## Copper pours and planes (outline as drawn; the poured copper is in the pictures)
+3V3 on PWR_LAYER: 0.2,0.64 0.58,0.25 29.69,0.25 30.53,1.09 30.53,22.96 37.31,29.74 76.73,29.74 79.65,26.82 128.85,26.82 129.46,27.43 129.46,38.94 128.6,39.8 1.35,39.8 0.2,38.66
+12V_MID on TOP: 60.73,16.74 60.73,6.5 60.78,6.45 61.85,6.45 62.34,6.95 62.34,11.28 62.57,11.51 64.36,11.51 64.52,11.66 64.52,12.98 64.21,13.28 62.38,13.28 62.03,13.64 62.03,16.71 61.95,16.79 60.78,16.79
+12V_MID on BOTTOM: 75.49,23.16 75.49,21.89 76.96,20.42 76.96,18.85 76.99,18.82 80.72,18.82 81.25,19.35 81.25,21.64 79.63,23.27 75.59,23.27
+12V_MID on BOTTOM: 49.71,23.16 49.71,21.89 51.18,20.42 51.18,18.85 51.21,18.82 54.94,18.82 55.47,19.35 55.47,21.64 53.85,23.27 49.81,23.27
+15V on TOP: 22.81,23.85 25.17,23.85 25.3,23.98 25.3,28.09 23.34,30.05 23.34,32.28 22.91,32.72 19.15,32.72 18.39,31.95 18.39,28.42 19.1,27.71 21.74,27.71 22.48,26.97 22.48,24.18
+20V_BOT on TOP: 92.38,16.71 92.38,6.48 92.43,6.43 93.5,6.43 93.99,6.92 93.99,11.25 94.22,11.48 96.01,11.48 96.16,11.63 96.16,12.95 95.86,13.26 94.03,13.26 93.68,13.61 93.68,16.69 93.6,16.76 92.43,16.76
+20V_TOP on TOP: 117.78,16.69 117.78,6.45 117.83,6.4 118.9,6.4 119.39,6.9 119.39,11.23 119.62,11.46 121.41,11.46 121.56,11.61 121.56,12.93 121.26,13.23 119.43,13.23 119.08,13.59 119.08,16.66 119,16.74 117.83,16.74
-5V_BOT on TOP: 92.02,21.87 92.02,17.53 91.77,17.27 91.77,11.33 91.69,11.25 90.53,11.25 90.47,11.3 90.47,17.93 90.83,18.29 90.83,21.87 90.86,21.89 92,21.89
-5V_BOT on BOTTOM: 96.85,19.35 96.85,21.34 96.88,21.36 103.17,21.36 103.56,20.98 103.56,19.05 103.33,18.82 100.13,18.82 99.87,19.08 98.81,19.08 98.55,19.33 96.88,19.33
-5V_BOT on PWR_LAYER: 86.89,20.8 102.69,20.8 103.68,19.81 103.68,11.89 100.74,8.94 100.74,0.69 100.46,0.41 95.2,0.41 93.75,1.85 93.75,4.65 91.82,6.58 83.13,6.58 82.25,7.47 82.25,11.63 83.62,13 85.29,13 85.6,13.31 85.6,19.51
-5V_MID on TOP: 67.46,18.21 68.94,18.21 68.96,18.19 68.96,15.24 68.63,14.91 67.89,14.91 67.26,15.54 67.26,18.01
-5V_MID on TOP: 60.15,21.87 60.15,11.3 60.1,11.25 58.88,11.25 58.78,11.35 58.78,16.99 58.95,17.17 58.95,21.87 58.98,21.89 60.12,21.89
-5V_MID on TOP: 41.17,18.21 43.21,18.21 43.23,18.19 43.23,15.32 42.93,15.01 41.2,15.01 41,15.21 41,18.03
-5V_MID on PWR_LAYER: 40.97,2.26 40.97,20.83 42.04,21.89 80.19,21.89 81,21.08 81,3.86 77.75,0.61 42.62,0.61
-5V_TOP on TOP: 117.42,21.87 117.42,17.53 117.17,17.27 117.17,11.33 117.09,11.25 115.93,11.25 115.87,11.3 115.87,17.93 116.23,18.29 116.23,21.87 116.26,21.89 117.4,21.89
-5V_TOP on BOTTOM: 122.25,19.35 122.25,21.34 122.28,21.36 128.57,21.36 128.96,20.98 128.96,19.05 128.73,18.82 125.53,18.82 125.27,19.08 124.21,19.08 123.95,19.33 122.28,19.33
-5V_TOP on PWR_LAYER: 112.17,20.9 127.97,20.9 128.96,19.91 128.96,3.73 125.73,0.51 117.73,0.51 116.61,1.63 116.61,5.51 115.77,6.35 107.95,6.35 107.52,6.78 107.52,12.37 108.25,13.11 110.57,13.11 110.87,13.41 110.87,19.61
0 on TOP: 44.2,18.21 45.77,18.21 45.9,18.08 45.9,14.96 45.59,14.66 44.32,14.66 44.02,14.96 44.02,18.03
0 on TOP: 3.38,24.38 7.57,24.38 7.9,24.05 10.26,24.05 10.54,23.77 13.08,23.77 13.11,23.75 13.11,22.17 12.73,21.79 3.35,21.79 3.33,21.82 3.33,24.33
0 on TOP: 69.8,18.01 70,18.21 71.5,18.21 71.81,17.91 71.81,14.99 71.48,14.66 70.13,14.66 69.8,14.99
0 on BOTTOM: 45.19,18.21 45.59,17.81 45.59,15.44 45.06,14.91 44.35,14.91 44.02,15.24 44.02,16.56 43.66,16.92 41.91,16.92 41.78,17.04 41.78,18.16 41.83,18.21
0 on BOTTOM: 70.84,18.08 71.25,17.68 71.25,15.32 70.71,14.78 70,14.78 69.67,15.11 69.67,16.43 69.32,16.79 67.56,16.79 67.44,16.92 67.44,18.03 67.49,18.08
0 on BOTTOM: 98.83,18.47 99.85,18.47 100.1,18.21 103.3,18.21 103.68,17.83 103.68,16.87 103.4,16.59 100.71,16.59 99.92,17.37 98.86,17.37 98.81,17.42 98.81,18.44
0 on BOTTOM: 124.23,18.47 125.25,18.47 125.5,18.21 128.83,18.21 128.96,18.08 128.96,17.2 128.68,16.92 124.69,16.92 124.21,17.4 124.21,18.44
0 on PWR_LAYER: 24.18,39.12 24.18,27.23 27.41,24 29.97,24 37.16,31.19 76.89,31.19 80.19,27.89 128.09,27.89 129.46,29.26 129.46,38.91 128.65,39.73 24.79,39.73 ; 1 cut-out
0 on GND_LAYER: 112.17,20.9 127.97,20.9 128.96,19.91 128.96,3.73 125.73,0.51 117.73,0.51 116.61,1.63 116.61,5.51 115.77,6.35 115.77,7.44 115.49,7.72 108.33,7.72 108.05,8 108.05,12.27 108.89,13.11 110.57,13.11 110.87,13.41 110.87,19.61
0 on GND_LAYER: 40.97,20.83 40.97,2.26 42.62,0.61 77.75,0.61 81,3.86 81,21.08 80.19,21.89 42.04,21.89
0 on GND_LAYER: 0.2,38.66 0.2,0.64 0.58,0.25 29.69,0.25 30.53,1.09 30.53,20.55 36.8,26.82 128.85,26.82 129.46,27.43 129.46,38.94 128.6,39.8 1.35,39.8
0 on GND_LAYER: 86.89,20.8 102.69,20.8 103.68,19.81 103.68,11.89 100.74,8.94 100.74,0.69 100.46,0.41 95.2,0.41 93.75,1.85 93.75,4.65 90.78,7.62 83.06,7.62 82.78,7.9 82.78,12.17 83.62,13 85.29,13 85.6,13.31 85.6,19.51
N14260848 on TOP: 6.27,25.37 6.27,24.77 6.35,24.69 15.65,24.69 15.93,24.97 15.93,32.08 15.01,32.99 12.34,32.99 11.07,31.72 11.07,28.02 8.53,25.48 6.38,25.48
N14275449 on TOP: 66.95,18.8 71.48,18.8 71.5,18.82 71.5,21.13 70.99,21.64 67.56,21.64 66.75,20.83 66.75,19
N14275449 on BOTTOM: 69.09,23.16 72.31,23.16 72.34,23.14 72.34,21.89 72.31,21.87 71.55,21.87 70.99,21.31 70.99,18.85 70.97,18.82 66.93,18.82 66.75,19 66.75,20.83
N14278260 on TOP: 41.17,18.8 45.69,18.8 45.72,18.82 45.72,21.13 45.21,21.64 41.78,21.64 40.97,20.83 40.97,19
N14278260 on BOTTOM: 43.31,23.16 46.53,23.16 46.56,23.14 46.56,21.89 46.53,21.87 45.77,21.87 45.21,21.31 45.21,18.85 45.19,18.82 41.15,18.82 40.97,19 40.97,20.83

## Text on the board
Ref Des/Silkscreen Top: RST | FLT | RDY | PWM4 | PWM3 | PWM2 | PWM1
TOLERANCE_TOP: FIGURE | FINISHED_SIZE | 13.0 | 35.0 | 42.0 | DRILL CHART: TOP to BOTTOM | ALL UNITS ARE IN MILS | PLATED | QTY | 130 | 16
